# Altium PCB CH32F&V208R-R0-1v1.PcbDoc (part 2 of 3)
Units mil, origin at the board's own origin, x right, y up, seen from the top; angles counter-clockwise.
Board outline 3405.51 x 3740.16 mil, 2 copper layers (Top Layer, Bottom Layer); 61 components, 89 nets, 339 pads, 976 vias.
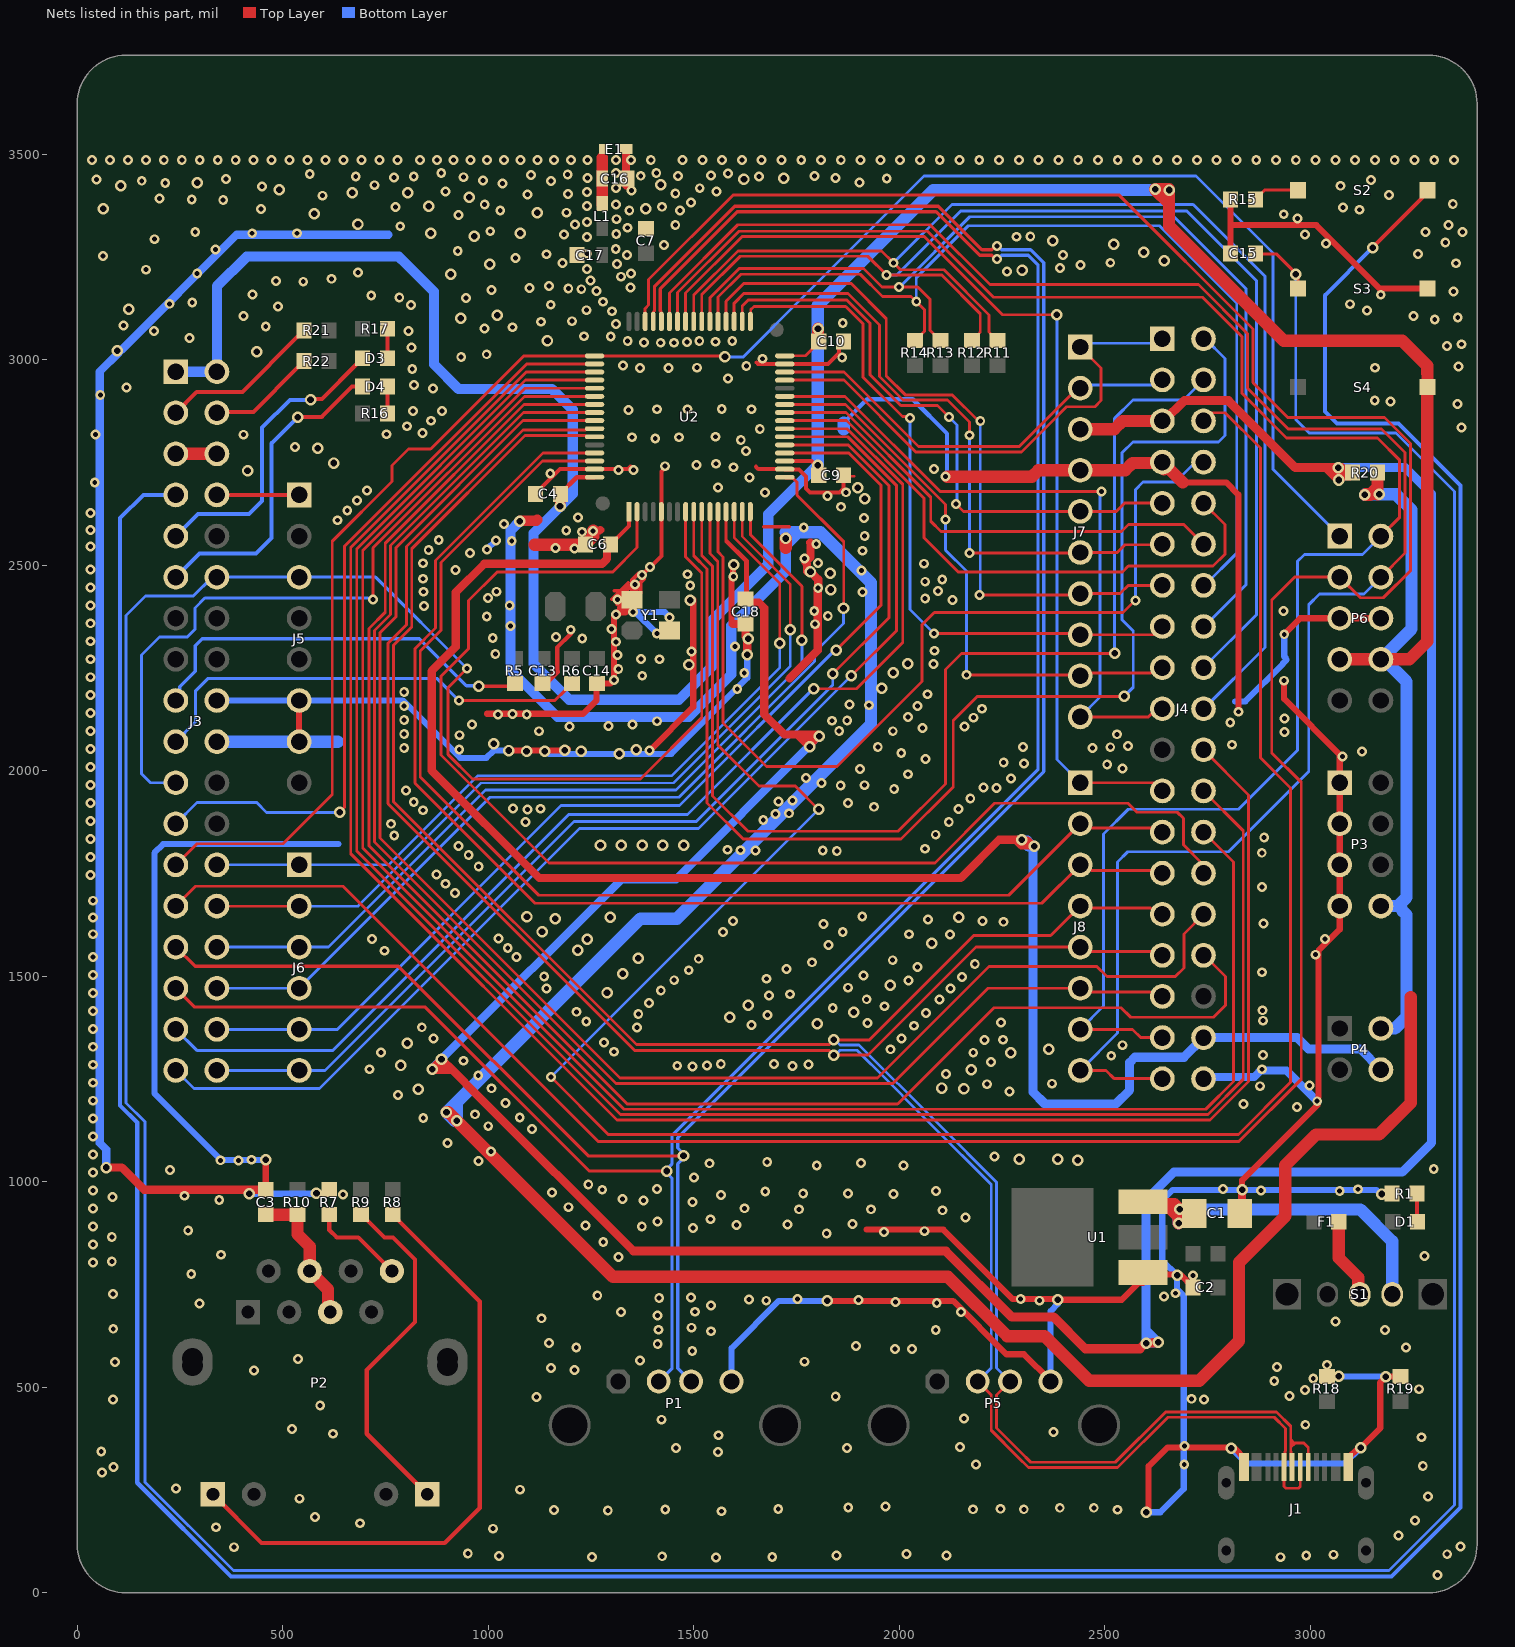
[diagram p2: the nets of this part, all layers, seen from the top]

## Via types
v1: diameter 24, hole 12, Top Layer to Bottom Layer, tented both sides, 809 vias
v2: diameter 28, hole 16, Top Layer to Bottom Layer, tented both sides, 167 vias

## Nets (pads, with @x,y where several pads share a name; then routed paths per layer and width w, separated by ;. In a path a pad name is that pad's centre, name@x,y a point inside that pad or via, vN(x,y) a via of type N, cw(c..) or ccw(c..) an arc to the next point about the centre after c; other vN are vias at no path point) (continued)
GND: C1.2 C2.2 C3.1 C4.2 C6.2 C7.2 C9.1 C10.1 C13.1 C14.1 C15.1 C16.1 C17.1 C18.2 E1.0 J1.A1 J1.B1 J3.5 J3.6 J3.18 J3.20 J4.7 J4.38 J5.6 J5.7 J7.4 P1.4 P3.1 P3.3 P3.5 P3.7 P5.4 P6.5 P6.6 R1.1 R7.1 R15.1 R18.2 R19.2 S3.1 U1.1 U2.5 U2.18 U2.31 U2.63 Y1.2 Y1.4 | length 27183.1
  Top Layer w6: 1591.3,2359.85 1594.82,2356.34
  Top Layer w7: 1112.3,2609.87 1113.28,2609.87 ; 1716.52,2547.24 1717.52,2546.24 ; 1722.74,2541.01 1717.52,2546.24 ; 1731.52,2546.24 1723.75,2546.24 1717.52,2546.24 ; C9.1@1866.65,2715.39 1867.24,2715.98 1889.28,2715.98
  Top Layer w8: 1300.4,2417.01 1320.9,2437.51 ; v1@1305.67,2421.76 1311.84,2421.76 1339.66,2449.58 v1@1349.16,2449.58 ; 1305.99,2437.51 1320.9,2437.51 ; v1(1314.15,2415.82) 1315.4,2415.82 v1@1349.16,2449.58 ; 1340.4,2457.01 1320.9,2437.51 ; 1669.33,2593.51 1731.95,2593.51 ; v1@1349.16,2449.58 1349.74,2450.16 1352.22,2452.64 v1(1356.33,2452.64) 1353.27,2449.58 1349.74,2449.58 v1@1349.16,2449.58
  Top Layer w10: C4.2@1115.12,2673.25 1115.12,2674.23 1174.18,2733.29 U2.63@1258.39,2733.29 1339.59,2733.29 v1@1345.74,2739.44 ; C13.1@1132.17,2212.01 C13.1@1133.15,2212.01 ; 1167.55,2299.76 v1@1200.48,2332.69 ; Y1.4@1357.44,2436.67 1364.47,2443.7 1370.33,2443.7 ; v1@1365.24,2479.6 1349.74,2464.09 1349.74,2450.16 1349.74,2449.58 Y1.4@1349.74,2415.82 1350.33,2415.82 1351.9,2415.82 1353.68,2415.82 1370.33,2432.47 1370.33,2443.7 ; v1(1374.19,2475.83) 1420.87,2522.52 U2.5@1420.87,2629.87 1420.87,2727.73 1429.89,2736.74 v1(1429.89,2740.53) ; v1@1378.59,2466.26 1370.33,2458 1370.33,2443.7 ; v1(1558.67,2688.79) v1@1560.58,2690.71 ; 1650.78,2739.09 1656.59,2733.29 U2.18@1721.15,2733.29 1721.5,2732.95 1755.62,2732.95 1772.82,2715.75 1772.82,2686.06 1782.35,2676.53 1854.46,2676.53 1864.37,2686.44 C9.1@1864.37,2718.39 ; 1653.04,2992.55 1656.4,2989.2 U2.31@1721.15,2989.2 1826.41,2989.2 1853.39,3016.18 1853.39,3029.72 1856.26,3032.59 C10.1@1869.8,3032.59
  Top Layer w12: 1167.55,2246.41 1167.55,2299.76
  Top Layer w15: C3.1@458.47,980.52 458.62,980.66 458.62,1052.88 v2(458.75,1053.02) ; J5.7@539.76,2070.54 J5.6@539.76,2170.54 ; 997.11,2138.19 1230.44,2138.19 1263.31,2171.06 1263.31,2212.02 C14.1@1264.31,2212.02 1296.97,2212.02 v1(1305.75,2220.8) 1305.75,2375.77 v1(1310.15,2380.16) v1@1317.8,2387.81 ; v2(1050,2048.87) 1189.9,2048.87 v2@1193.28,2052.25 ; C13.1@1132.15,2206.01 1166.55,2240.41 ; v1@1315.4,2415.82 Y1.4@1340.22,2415.82 ; v1@1315.67,2407.25 Y1.4@1331.65,2407.25 ; 1320.28,2395.88 Y1.4@1331.65,2407.25 ; Y1.4@1350.33,2415.82 1351.9,2417.39 1351.9,2415.82 v1(1351.9,2385.78) ; v1(1392.36,2048.78) 1498.5,2154.92 v2@1498.5,2416.59 ; 1591.3,2359.85 1591.3,2472.26 1594.87,2475.82 1594.87,2498.77 v2@1597.35,2501.25 ; v2(1824.06,709.96) 2130.51,709.96 2260.42,580.05 2302.81,580.05 2367.63,515.23 P5.4@2367.63,513.94 ; 1920.01,883.27 2106.7,883.27 2275.82,714.15 v1(2295.06,714.15) 2384.04,714.15 v2(2385.48,712.72) 2541.07,712.72 2582.26,753.91 U1.1@2592.58,753.91 ; U1.1@2592.58,778.91 2597.19,774.29 v2@2681.5,774.29 ; v2(2600.47,195.69) 2600.47,199.21 2606.13,204.87 2606.13,307.46 2652.33,353.66 2805.07,353.66 v2(2807.43,351.3) ; v2@2682.93,774.29 2714.12,743.1 C2.2@2714.12,742.72 ; 2689.27,2701.03 2795.02,2701.03 2824.65,2671.39 v1(2824.65,2143.13) ; C15.1@2805.76,3258.02 2805.76,3326.97 ; R15.1@2805.76,3389.32 2805.76,3326.97 ; v2@2817.7,348.82 2838.24,328.27 J1.A1@2838.24,305.64 ; v2(2833.67,979.93) 2833.67,1003.34 3016.37,1186.03 v1(3016.37,1195.75) ; v1(2935.76,2218.72) 2935.76,2174.25 3073.91,2036.1 v1@3073.91,2034.38 ; v1(2936.29,2331.58) 2975.29,2370.58 3171.38,2370.58 P6.6@3171.43,2370.53 ; v1@3019.2,1204.94 3019.2,1561.23 3071.43,1613.46 P3.7@3071.43,1670.54 P3.5@3071.43,1770.54 P3.3@3071.43,1870.54 P3.1@3071.43,1970.54 v1@3071.43,2034.38 ; R18.2@3040.06,526.17 3040.23,526.34 3069.06,526.34 v2(3069.23,526.52) ; J1.B1@3092.18,305.64 3092.18,328.27 3114.45,350.54 3119.72,350.54 v2(3122.2,353.03) 3169.66,400.49 3169.66,511.42 v2(3183.62,525.38) 3184.02,525.77 3218.81,525.77 R19.2@3219.21,526.17 ; v2(3173.34,969.89) 3173.93,970.48 3198.19,970.48 R1.1@3198.78,971.07 ; S3.1@3284.39,3172.51 3168.51,3172.51 3014.05,3326.97 2805.76,3326.97 ; v1@1317.8,2387.81 1320.4,2385.21 1333.72,2385.21 1333.72,2401.66 Y1.4@1339.3,2407.25 ; v1@1317.8,2387.81 Y1.4@1337.23,2407.25 ; Y1.4@1331.65,2407.25 Y1.4@1340.22,2415.82 ; Y1.4@1331.65,2407.25 Y1.4@1337.23,2407.25 ; Y1.4@1337.23,2407.25 Y1.4@1339.3,2407.25 ; Y1.4@1337.23,2407.25 Y1.4@1345.8,2415.82 ; Y1.4@1339.3,2407.25 1341.17,2407.25 Y1.4@1349.74,2415.82 Y1.4@1347.87,2415.82 ; Y1.4@1339.3,2407.25 Y1.4@1347.87,2415.82 ; Y1.4@1340.22,2415.82 Y1.4@1345.8,2415.82 ; Y1.4@1345.8,2415.82 Y1.4@1347.87,2415.82
  Top Layer w20: v2(70.46,1034.42) 108.26,1034.42 162.17,980.52 C3.1@458.47,980.52 ; v1@1255.9,2583.15 1256.67,2583.92 1270.43,2583.92 1272.03,2585.51 ; C16.1@1335.21,3424.1 E1.0@1335.21,3511.98 ; Y1.4@1349.74,2415.82 1351.14,2414.42 1351.14,2386.55 v1(1351.9,2385.78) ; 1594.82,2356.34 C18.2@1625.64,2356.34 v2@1625.64,2326.22 ; v2(1630,2282) 1630,2318.91 v2(1631.92,2320.82) ; 1733.01,2223.85 1801.21,2292.05 1801.21,2443.35 v1(1802.44,2444.57) 1802.44,2465.24 v2(1783.67,2484) ; v1(1769,2515.63) 1780.56,2515.63 1784.01,2519.08 1784.01,2554.37 1783.37,2555.01 ; v1@1771.37,2506.43 1775,2502.8 v2@1775,2484 ; C1.2@2827.59,922.82 2833.67,928.91 v2(2833.67,979.93)
  Top Layer w25: v2(1076.65,2606.9) 1077.23,2607.47 1116.38,2607.47 1119.02,2610.11
  Top Layer w30: J3.5@239.76,2770.54 J3.6@339.76,2770.54 ; v2(898.12,1169.2) 902.45,1169.2 v2(923.65,1148) 1303.16,768.49 2118.09,768.49 2262.32,624.26 2353.16,624.26 2462.09,515.33 2729.12,515.33 2777.06,563.27 2826,612.22 2826,803.58 2938.86,916.44 2938.86,1040.17 3013.32,1114.63 3166.9,1114.63 3243.97,1191.7 3243.97,1449.23 ; 1112.3,2549.24 1112.79,2549.73 1235.84,2549.73 C6.2@1236.33,2550.22 1239.64,2553.53 1239.64,2554.51 1254.87,2569.74 v1(1254.87,2583.15) ; 1722.74,2547.01 1723.75,2548.03 ; 1723.75,2542.03 1723.75,2546.24 1723.75,2548.03 ; v2@1723.75,2563.7 1723.75,2548.03 ; v1@2116.25,2715.13 2322.71,2715.13 2338.12,2730.54 J7.4@2439.76,2730.54 2549.39,2730.54 2567.25,2748.4 2637.62,2748.4 J4.7@2643.82,2733.39 ; J4.7@2639.76,2740.36 J4.7@2643.82,2733.39 ; J4.7@2639.76,2750.54 J4.7@2643.82,2746.48 ; J4.7@2643.82,2753.39 J4.7@2643.82,2746.48 ; 2689.27,2701.03 J4.7@2643.82,2746.48 ; J4.7@2643.82,2733.39 J4.7@2643.82,2746.48
  Bottom Layer w10: 1864.37,2846.01 1921.71,2903.35 2032.47,2903.35 2116.25,2819.57 v1@2116.25,2715.13
  Bottom Layer w15: J3.18@339.76,2170.54 J5.6@539.76,2170.54 791.41,2170.54 931.18,2030.77 995.16,2030.77 1013.26,2048.87 v2(1050,2048.87) ; v2(418.3,970.55) 580.86,970.55 v2(581.87,971.57) ; v2(458.75,1053.02) 349.49,1053.04 187.83,1214.69 187.83,1799.91 209.34,1821.41 635.37,1821.41 ; v1(996.32,2537.95) 1017.88,2559.51 v1(1018.24,2559.51) ; v2@1147.95,2040.71 1445.36,2040.71 1630,2225.35 v2(1630,2282) ; v1@1317.09,2415.31 1318.31,2414.1 1323.59,2414.1 v1(1351.9,2385.78) v1@1357.85,2385.78 ; v1(1409.79,2333.84) v1@1357.85,2385.78 ; v1@1442.12,2374.03 1440.95,2374.03 1429.2,2385.78 v1@1357.85,2385.78 ; P1.4@1591.63,513.94 1591.63,595.05 1706.54,709.96 v2(1824.06,709.96) ; P5.4@2367.63,513.94 2367.63,684.54 2385.48,702.39 v2(2385.48,712.72) ; v2(2600.47,195.69) 2635.06,195.69 2691.72,252.36 2691.72,722.45 2675.5,738.68 v2(2675.5,771.81) 2639.6,807.71 2639.6,954.78 2664.75,979.93 v2(2833.67,979.93) 3160.25,979.93 3170.29,969.89 v2(3173.34,969.89) ; v2(2807.43,351.3) 2844.08,314.65 3083.83,314.65 v2(3122.2,353.03) ; 2816.49,2168.24 2841.52,2168.24 2933.35,2260.06 2933.35,2261.03 2942,2269.68 ; v1(2936.29,2331.58) 2936.29,2277.34 2940.78,2272.85 ; v2(3069.23,526.52) 3069.8,525.95 3183.05,525.95 v2(3183.62,525.38)
  Bottom Layer w20: v2(70.46,1034.42) 70.46,1077.96 54.66,1093.75 54.66,2970.49 v2@101.37,3017.2 ; v2@99.48,3019.09 99.48,3022.15 100.57,3023.24 107.41,3023.24 387.74,3303.57 757.44,3303.57 ; J4.38@2739.76,1250.54 2743.59,1254.37 2863.26,1254.37 v1(2882.42,1273.53) ; v1@2882.42,1270.54 2941.58,1270.54 v1(3016.37,1195.75)
  Bottom Layer w25: v2(1076.65,2606.9) 1076.65,2606.57 1053.99,2583.91 1053.99,2244.69 1168.31,2130.37 1487.86,2130.37 1591.22,2233.73 1591.22,2352.3 1723.75,2484.84 1723.75,2546.44 ; 1723.75,2579.7 v2(1723.75,2564.7) 1723.75,2546.44 ; 1757.01,2579.7 1723.75,2546.44
  Bottom Layer w30: J3.20@339.76,2070.54 J5.7@539.76,2070.54 633.28,2070.54 ; v2(898.12,1169.2) 898.12,1168.4 v2@898.39,1168.13 ; 1723.75,2579.7 1757.01,2579.7 1808.18,2579.7 1930.99,2456.88 1930.99,2111.95 1458.93,1639.89 1370.15,1639.89 923.65,1193.39 ; 1864.37,2830.02 1864.37,2846.01 ; v2@898.39,1168.13 923.65,1193.39 ; v2@898.39,1168.13 918.52,1148 v2(923.65,1148) 923.65,1193.39
  other v1: 3309.02,43.07 1554.03,85.73 2927.33,86.41 1251.82,87.03 1690.68,86.82 1026.02,88.94 1422.96,88.62 1847,90.1 2114.84,90.1 2989.7,90.97 3055.88,92.49 2017.54,94.47 3332.66,93.7 950.01,95.59 380.95,110.71 3365.02,112.49 3214.44,138.9 1011.58,155.75 337.56,159.21 688,168.98 3254.19,175.6 578.68,184.23 1567.09,198.25 1290.64,199.71 1159.68,201.16 2530.52,201.76 1430.32,202.62 2179.04,202.96 2302.6,202.96 1705.32,204.07 2246.22,204.16 1875.56,206.98 2390.17,206.56 2472.94,206.56 1965.77,209.89 540.55,228.72 3286.3,233.7 1076.75,250.63 240.49,253.49 59.8,292.61 87.95,305.9 3273.3,308.61 2186.24,312.12 2692.89,312.36 1558.36,342.3 58.24,343.44 1456.51,352.49 1872.65,352.49 2147.85,354.11 2693.77,357.27 3270.24,378.18 1559.82,383.04 621.71,386.66 2374.83,391.21 522.3,398.49 2987.47,408.59 1421.59,420.87 2157.45,423.68 590.94,455.29 86.64,469.9 2740.7,470.07 2710.78,471.74 1117.32,475.89 1845,477.62 2949.41,478.18 2986.61,492.74 3264.13,495.14 2911.86,514.94 3006.77,521.01 429.99,540.5 1209.6,541.65 1152.06,546.65 2918.5,549.01 3040.06,554.48 91.49,561.24 1769.34,562.01 1369.09,565.18 536.5,568.9 1496.08,588.06 1989.5,592.82 2030.29,592.82 3231.97,596.2 1213.81,596.83 1894.48,599.84 1412.02,605.18 1147.95,607.09 1541.31,636.02 2088.37,639.48 3181.61,638.73 1413.81,639.76 87.45,642.07 1493.9,644.74 3060.72,660.04 1128.9,667.58 1411.57,674.34 1322.82,682.94 1503.04,683.48 2149.99,682.84 1541.62,698.69 297.45,703.81 2090.9,704.6 1990.51,707.51 1676.02,710.37 2340.68,710.43 1900.3,711.88 1634.02,713.33 1751.88,714.79 1415.61,716.55 1493.35,717.77 2643.39,720.8 1265.05,723.2 87.17,726.67 2671.81,728.59 2714.12,772.01 277.24,774.99 37.95,803.55 83.97,805.65 1316.36,816.77 3277.39,819.39 349.52,822.16 37.95,847.26 1279.5,853.63 83.97,865.42 1823.14,873.45 1962.26,877.08 2061.46,879.5 269.8,881.29 1497.84,887.08 37.95,890.97 1373.34,890.53 1236.49,893.13 1603.41,894.56 1728.01,895.77 1885.81,897.22 1411.33,903.14 1540.06,908.54 2160.69,912.47 2105.01,930.31 1755.4,932.73 1930.81,932.73 37.95,934.68 1623.54,935.15 1195.24,937.89 1497.05,950.94 1377.53,954.48 345.32,955.74 1326.36,958.22 86.1,962.54 260.67,965.75 1566.28,967.46 646.27,969.01 1985.25,970.23 1765.99,971.59 1874.79,971.59 1155.17,973.61 1673.71,975.72 2088.86,977.12 37.95,978.39 3071.09,977.64 2879.54,978.84 1277.06,980.37 3115.94,981.48 1410.14,982.15 2787.41,981.77 1243.2,992.85 1500.21,1010.07 37.95,1022.1 225.97,1028.55 3299.88,1030.56 1798.97,1039.39 2009.84,1039.37 1537.93,1044.64 1906.95,1045.68 1678.41,1047.78 976.15,1050.15 392.49,1051.26 348.72,1051.94 423.94,1053.31 2231.5,1061.16 37.95,1065.81 1006.68,1073.54 900.79,1093.68 37.95,1109.52 1105.91,1128.51 999.84,1134.93 37.95,1153.23 841.67,1154.74 1076.45,1156.32 967.68,1163.82 2966.91,1181.89 2836.98,1189.22 1042.09,1191.09 37.95,1196.95 780.6,1210.62 2267.54,1219.67 1007.32,1227.09 2877.18,1232.19 2997.28,1233.62 2213.48,1237.12 2371.26,1238.27 37.95,1240.66 975.41,1258.59 2113.23,1261.9 710.72,1273.5 1496.88,1279.9 1740.31,1281.5 1459.58,1281.9 1532.17,1282.23 37.95,1284.37 1778.49,1285.42 1695.28,1286.4 1565.47,1286.56 2222.49,1291.19 939.41,1294.18 2515.41,1306.35 2884.54,1308.04 738.97,1314.3 2179.69,1313.72 1305.43,1316.01 1978.62,1321.97 37.95,1328.08 2542.56,1331.94 1281.78,1338.23 2206.72,1344.69 2252.34,1345.26 866.22,1348.48 2005.01,1348.7 37.95,1371.79 1361.3,1374.99 838.11,1375.52 2035.48,1379.27 1640.34,1380.75 1922.05,1386.08 2247.27,1386.93 1238.19,1390.01 2884.28,1391.52 1679.42,1405.73 1364.76,1407.58 2064.59,1409.92 1214.23,1413.22 37.95,1415.5 2883.21,1416.89 1837.92,1422.45 1963.84,1426.79 1391.11,1434.62 1920.42,1443.61 2097.1,1443.55 1682.39,1452.83 1733.91,1455.9 37.95,1459.21 1419.54,1465.13 1141.65,1469.46 2124.6,1470.13 1874.83,1471.84 2021.82,1489.28 1452.14,1490.1 1676.43,1493.58 2151.96,1498.18 1135.89,1499.3 1912.57,1501.94 37.95,1502.92 2882.2,1509.5 1487.5,1514.37 1724.94,1517.64 2043.7,1522.12 2183.44,1529.66 1787.21,1533.65 1983.68,1538.76 1511.77,1542.11 37.95,1546.63 1068.39,1546.55 3012.26,1552.15 747.67,1561.65 1047.26,1568.16 1827.8,1575.33 3035.65,1590.16 716.66,1590.6 1024.69,1591.69 2122.89,1601.3 37.95,1601.99 2023.53,1601.81 1570.72,1607.29 1862.21,1607.17 1815.66,1626.43 2885.96,1628.38 2253.2,1632.13 1594.99,1634.33 2202.45,1634.17 2069.43,1638.12 37.95,1642.72 1909.55,1644.95 37.95,1683.46 918.54,1702.56 2881.98,1716.38 895.61,1724.7 32.17,1746.35 873.86,1747.63 976.54,1766.83 32.17,1790.07 952.24,1794.37 2881.61,1800.03 1813.57,1805.5 1847.73,1804.55 1613.31,1806.22 1649.59,1805.72 1581.78,1807.47 2062.18,1809.92 926.99,1816.38 32.17,1833.78 2887.41,1836.97 771.08,1842.11 2088.31,1844.02 763.17,1870.57 1090.64,1875.21 2120.19,1874.58 32.17,1877.49 1668.77,1879.46 1698.72,1894.43 1731.34,1896.1 841.21,1903.53 1094.89,1905.3 2144.11,1906.46 1127.27,1907.26 1060.23,1907.58 1938.54,1911.91 32.17,1921.2 1875.04,1921.28 818.49,1923.45 1705.71,1924.72 1739.99,1927.38 2172.45,1932.15 799.41,1951.23 1987.35,1955.46 2236.37,1957.53 2204.65,1958.53 1857.15,1963.76 1915.06,1964.44 32.17,1964.91 1810.69,1969.93 2271.56,1980.34 1773.02,1981.7 2021.05,1991.09 1904.43,2003.95 2542.48,2005.35 32.17,2008.62 2505.54,2014.83 2303.29,2017.02 2253.72,2019.99 2063.06,2028.61 3078.07,2034.38 2004.52,2042.91 3125.66,2046.01 929.19,2051.13 32.17,2052.33 795.28,2055 2469.81,2055.31 2513.02,2056.88 1947.46,2057.53 2300.81,2057.66 2555.91,2060.01 2809.02,2062.89 929.74,2086.15 2529.52,2088.3 795.28,2089.08 2937.17,2093.6 32.17,2096.04 1123.61,2095.85 1853.51,2096.32 1983.93,2095.86 2056.32,2103.33 1197.75,2107.02 2158.25,2107.49 1292.12,2108.82 960.09,2112.1 1350.7,2112.23 2804.78,2116.9 1409.85,2120.19 1835.6,2121.26 1873.01,2122.22 795.28,2123.16 2936.82,2127.16 2180.64,2128.7 2021.28,2129.99 1023.07,2136.88 1058.62,2137.24 1093.44,2136.52 32.17,2139.75 2201.18,2150.42 795.28,2157.25 2044.14,2157.35 1926.02,2158.92 1878.17,2161.15 32.17,2183.47 2067.96,2185.68 795.28,2191.33 1605.59,2198.29 32.17,2227.18 1374.35,2230.73 1622.55,2237.35 1316.19,2247.46 2082.64,2259.31 32.17,2270.89 1416.74,2270.85 1371.32,2271.61 1314.51,2281.49 1016.95,2283.62 1494.65,2289.87 2085.01,2291.5 1600.45,2301.6 1310.21,2313.3 32.17,2314.6 1010.65,2322.25 1228.4,2321.77 1164.42,2324.92 1200.48,2342.69 1299.61,2344.52 1053.48,2351.33 1795.08,2356.11 32.17,2358.31 1440.29,2372.67 996.08,2375.06 1825.83,2375.78 1792.86,2388.25 2934.5,2388.57 843.53,2400.51 32.17,2402.02 1051.95,2401.84 2128.76,2415.35 2062.72,2418.75 999.15,2419.78 1910.65,2434.24 841.93,2435.02 1020.27,2435.19 2094.04,2437.24 32.17,2445.73 1491.23,2449.84 2062.72,2459.51 2104.23,2464.79 840.66,2466.65 1595.95,2472.26 1484.36,2477.62 1908.19,2486.58 919.68,2487.56 32.17,2489.44 1392.92,2495.55 2059.7,2503.28 840.98,2504.36 1801.7,2505.24 955.68,2529.63 1910.65,2534.83 854.86,2536.49 1163.5,2541.39 1209.23,2540.74 32.17,2544.8 1797.72,2551.51 1056.92,2558.85 879.32,2560.92 1915.55,2570.82 1228.04,2580.92 1189.52,2584.52 32.17,2585.53 1767.36,2591.71 1038.03,2599.49 632.71,2609.01 1913.92,2614.16 1217.68,2615.53 32.17,2626.27 656.71,2633.01 1857.6,2641.75 680.71,2657.01 1824.79,2668 1672.94,2676.29 1869.9,2677.02 704.71,2681.01 42.55,2701.27 1635.61,2712.75 2112.25,2715.13 1150.6,2722.97 1316.43,2731.42 1353.5,2730.98 2084.15,2733.63 1596.55,2737.92 1506.27,2743.13 1553.87,2746.46 1627.14,2777.86 529.45,2787.03 1614.13,2803.82 1406.03,2807.97 1349.71,2810.93 1464.14,2810.93 1552.48,2812.12 404.11,2817.14 44.04,2817.91 752.67,2818.31 839.44,2821.51 1660.38,2831.09 3367.35,2834.65 801.78,2837.64 860.56,2851.01 816.85,2874.48 887.27,2874.92 1340.82,2877.34 1410.18,2879.12 1484.29,2879.12 1640.22,2879.12 1567.89,2879.71 3357.36,2891.63 3194.57,2897.63 3156.3,2900.72 56.01,2913.31 864.93,2929.5 120.16,2931.88 819.09,2938.04 1583.3,2953.74 814.89,2977.15 1369.13,2978.96 1438.15,2978.96 1507.76,2980.14 3156.73,2980.03 3359.76,2983.07 1627.51,2984.16 1327.24,2985.38 1667.13,3001.89 1860.81,3004.77 933.99,3006.15 996.04,3012.73 812.94,3029.35 3332.46,3033.23 3367.58,3037.2 1378.37,3041.37 1419.27,3040.87 1452.09,3040.87 1482.89,3042.38 1552.68,3043.25 1338.99,3045.41 1513.18,3045.12 1593.31,3044.89 273.22,3052.55 1297.75,3055.65 1232.63,3056.64 186.99,3069.48 806.09,3069.17 990.8,3075.49 1058.63,3078.57 458.52,3080.27 112.64,3082.78 1310.33,3086.46 1862.21,3088.51 1127.98,3091.85 1203.56,3093.22 3302.32,3097.01 3358.36,3102.46 404.71,3105.85 3250.4,3106.16 1301.03,3117.39 3137.52,3119.28 1238.95,3120.02 488.51,3128.78 812.08,3133.05 1151.75,3133.35 3096.23,3134.65 224.06,3135.56 279.67,3138.79 1279.18,3140.51 945.39,3149.41 783.41,3151.03 715.07,3155.47 425.88,3157.89 3171.01,3157.58 3347.77,3165.2 1262.77,3166.76 1007.83,3169.03 1226.17,3171.13 1194.51,3172.79 1100.49,3173.87 1345.88,3175.49 1147.29,3178.9 549.78,3189.37 483.21,3191.41 1248.19,3192.58 618.7,3196.4 1322.36,3201.48 291.76,3208.9 1347.15,3209.55 682.88,3211.84 2261.61,3214.01 166.84,3218.57 1239.92,3220.23 2391.11,3222.33 2440.96,3229.68 1313.22,3232.22 1180.06,3234.46 3354.14,3234.22 2513.05,3235.41 1066.22,3246.59 62.88,3251.61 1337,3254.12 2397.58,3254.14 1141.18,3256.12 1239.92,3257.31 3261.25,3256.72 925.61,3263.89 336.08,3267.73 1309.92,3268.8 1427.25,3278.42 3037.97,3282.61 3328,3284.74 187.8,3292.72 1239.92,3298.2 2284.51,3298.7 2318.46,3299.32 1183.95,3304.45 2986.4,3303.85 1311.11,3305.61 425.54,3307.22 534.34,3307.22 286.92,3310.45 3280.2,3310.28 3370.03,3310.28 1004.72,3312.04 1338.79,3320.53 785.75,3324.25 1454.78,3327.39 1211.17,3328.34 3335.42,3327.59 1239.92,3334.76 1311.71,3341.37 2968.52,3343.03 927.36,3351.92 2934.97,3353.35 1190.06,3357.23 1029.01,3362.38 1342.93,3362.61 1466.07,3362.77 3118.89,3364.32 446.71,3366.32 3079.53,3370.13 773.94,3370.93 1422.8,3371.55 1239.92,3373.13 1310.5,3377.36 991.15,3377.58 3346.25,3378.54 1493.02,3381.71 355,3387.82 278.49,3389.37 200.14,3391.67 596.5,3398.58 3190.65,3400.48 1095.39,3401.86 1193.83,3402.45 1454.78,3403.89 1239.92,3407.24 895.88,3408.37 1555.03,3408.83 1348.1,3411.25 1310.98,3417.13 1514.25,3416.77 449.58,3420.61 3072.93,3422.62 723.19,3424.11 1034.73,3428.68 213.96,3429.69 1903.25,3430.86 1152.52,3433.89 156.86,3434.82 986.68,3435.39 3147.38,3436.71 46.77,3437.87 361.45,3438.91 1969.21,3440.37 1241.47,3441.41 1844.5,3441.62 770.65,3443.23 939.85,3443.54 677.39,3445.17 818.57,3445.17 1658.4,3445.39 1370.69,3446.93 1461.07,3446.65 1793.26,3446.9 1541.69,3447.78 1103.4,3448.89 1193.05,3450.4 565.45,3451.54 885.37,3453.4 1583.29,3452.85 1310.98,3453.69 1408.55,3453.83 35.67,3485.41 79.38,3485.41 123.09,3485.41 166.8,3485.41 210.51,3485.41 254.22,3485.41 297.93,3485.41 341.64,3485.41 385.35,3485.41 429.07,3485.41 472.78,3485.41 516.49,3485.41 560.2,3485.41 603.91,3485.41 647.62,3485.41 691.33,3485.41 735.04,3485.41 778.75,3485.41 834.11,3485.41 874.84,3485.41 915.58,3485.41 956.31,3485.41 997.05,3485.41 1037.79,3485.41 1078.52,3485.41 1119.26,3485.41 1159.99,3485.41 1200.73,3485.41 1241.47,3485.41 1310.98,3485.53 1347.12,3485.53 1395.24,3485.53 1472.46,3485.53 1520.59,3485.53 1568.71,3485.53 1616.83,3485.53 1664.96,3485.53 1713.08,3485.53 1761.2,3485.53 1809.33,3485.53 1857.45,3485.53 1905.58,3485.53 1953.7,3485.53 2001.82,3485.53 2049.95,3485.53 2098.07,3485.53 2146.19,3485.53 2194.32,3485.53 2242.44,3485.53 2290.57,3485.53 2338.69,3485.53 2386.81,3485.53 2434.94,3485.53 2483.06,3485.53 2531.18,3485.53 2579.31,3485.53 2627.43,3485.53 2675.55,3485.53 2723.68,3485.53 2771.8,3485.53 2819.93,3485.53 2868.05,3485.53 2916.17,3485.53 2964.3,3485.53 3012.42,3485.53 3060.54,3485.53 3108.67,3485.53 3156.79,3485.53 3204.92,3485.53 3253.04,3485.53 3301.16,3485.53 3349.29,3485.53
  other v2: 2433.73,1052.53 2291.85,1054.85 2384.89,1054.85 829.99,1224.82 2157.11,1226.46 2103.19,1227.81 2174.64,1272.29 786.82,1282.66 2270.36,1313.15 2363.38,1321.63 802.36,1336.19 1800.14,1384.06 1587.58,1399.7 1888.56,1412.6 1632,1429.27 1288.69,1459.79 1978.11,1478.24 1326.52,1506.18 1364.77,1543.21 1217.17,1562.61 2078.47,1579.69 1240.91,1589.96 1130.57,1607.96 1162.44,1639.83 1296.89,1643.08 2143.93,1642.96 1093.97,1644.55 1272.84,1818.69 1323.48,1818.69 1374.12,1818.69 1424.75,1818.69 1475.39,1818.69 1318.1,2041.26 1092.9,2046.93 1137,2047.23 1225.46,2047.18 1185.72,2049.13 1359.88,2050.38 1012.75,2065.14 1957.01,2199.83 1985.13,2238.13 1488.07,2257.32 2020.68,2259.89 1491.62,2414.13 1832.79,2440.54 1831.95,2479.75 1597.35,2500.25 1915.54,2660.96 1898.86,2688.21 414.14,2729.11 623.48,2748.28 584.91,2784.59 436.15,3019.34 96.87,3021.7 1143.83,3046.09 933.01,3100.19 1021.78,3107.58 125.55,3122.08 908.03,3207.93 2298.32,3216.7 1003.81,3231.77 2644.14,3240.76 2594.36,3260.88 2521.29,3279.94 2372.56,3288.65 965.43,3299.81 859.96,3307.62 1077.95,3307.66 682.86,3329 576.3,3354.6 1118.85,3356.57 62.9,3366.46 1383.01,3366.69 854.93,3373 953.48,3394.91 669.03,3405.69 803.51,3406.22 491.75,3413.24 105.6,3422.54 1419.39,3425.3 291.39,3430.16 1621.87,3438.19 1718.7,3440.69
KEY: J3.7 S2.1 | length 9440.3
  Top Layer w10: v2(3151.38,3272.1) 3151.38,3272.87 3286.1,3407.59 3283.03,3410.66 S2.1@3284.39,3412.01
  Bottom Layer w10: J3.7@239.76,2670.54 160.69,2670.54 104.34,2614.19 104.34,1185.72 145.91,1144.15 145.91,267.55 374.1,39.36 3197.2,39.36 3364.9,207.07 3364.9,2693.85 3214.08,2844.68 3064.3,2844.68 3035.55,2873.42 3035.55,3156.28 v2(3151.38,3272.1)
LED1: D3.2 J3.9 | length 738.5
  Top Layer w10: v2(567.37,2901.81) 569.7,2904.15 595.24,2904.15 679.82,2988.72 680.8,2988.72 694.11,3002.03 D3.2@694.11,3003.01
  Bottom Layer w10: J3.9@239.76,2570.54 293.29,2624.07 417.77,2624.07 449.75,2656.04 449.75,2834.24 517.32,2901.81 v2(567.37,2901.81)
LED2: D4.2 J3.11 | length 781.4
  Top Layer w10: v2(536.44,2860.06) 594.66,2860.06 668.61,2934.01 D4.2@694.11,2934.01
  Bottom Layer w10: J3.11@239.76,2470.54 297.51,2528.29 435.24,2528.29 472.66,2565.71 472.66,2796.27 v2(536.44,2860.06)
NetC3_2: C3.2 P2.4 P2.5 R10.1 | length 348.5
  Top Layer w30: C3.2@458.47,919.89 R10.1@535.72,919.89 ; R10.1@535.08,919.25 R10.1@535.72,919.89 ; P2.5@615.37,682.53 609.81,688.09 609.81,738.09 P2.4@565.37,782.53 565.37,842.25 535.72,871.89 R10.1@535.72,919.89
NetC16_2: C16.2 E1.1 L1.2 | length 114.5
  Top Layer w28.1: L1.2@1276.63,3376.21 1276.63,3490.74
NetD1_2: D1.2 R1.2 | length 69.2
  Top Layer w10: R1.2@3259.41,971.07 3259.41,903.84 D1.2@3260.79,902.46
NetD3_1: D3.1 R17.2 | length 72
  Top Layer w10: D3.1@754.74,3003.01 R17.2@754.74,3075.01
NetD4_1: D4.1 R16.2 | length 65
  Top Layer w10: R16.2@754.74,2869.01 D4.1@754.74,2934.01
NetF1_2: F1.2 S1.1 | length 195.8
  Top Layer w30: F1.2@3068.78,902.46 3068.78,814.17 3116.31,766.64 3116.31,737.79 S1.1@3124.42,729.67
NetJ3_3: J3.3 R21.2 | length 395.6
  Top Layer w10: J3.3@239.76,2870.54 290.54,2921.32 402.04,2921.32 537.45,3056.72 538.43,3056.72 551.74,3070.03 R21.2@551.74,3071.01
NetJ3_4: J3.4 R22.1 | length 264.5
  Top Layer w10: J3.4@339.76,2870.54 341.79,2872.57 428.29,2872.57 537.45,2981.72 538.43,2981.72 551.74,2995.03 R22.1@551.74,2996.01
NetJ3_8: J3.8 J5.1 | length 200
  Top Layer w10: J3.8@339.76,2670.54 J5.1@539.76,2670.54
NetP2_8: P2.8 R7.2 | length 231.1
  Top Layer w10: R7.2@612.97,919.89 612.97,882.58 631.28,864.27 683.63,864.27 P2.8@765.37,782.53
NetP2_9: P2.9 R8.2 | length 1535.8
  Top Layer w10: P2.9@329.74,239.53 448.29,120.98 893.99,120.98 979.1,206.09 979.1,708.26 781.77,905.6 781.77,906.58 768.46,919.89 R8.2@767.48,919.89
NetP2_12: P2.12 R9.2 | length 856.7
  Top Layer w10: R9.2@690.23,919.89 691.21,919.89 746.95,864.15 767.61,864.15 821.12,810.63 821.12,658.39 704.2,541.47 704.2,386.73 P2.12@851.39,239.53
NetR15_2: R15.2 S2.2 | length 113
  Top Layer w7: R15.2@2866.39,3389.32 2866.39,3390.3 2888.1,3412.01 S2.2@2969.43,3412.01
NRST: C15.2 J3.12 J5.3 S3.2 U2.8 | length 11313.1
  Top Layer w7: v1(948.09,2248.32) 902.29,2202.52 902.29,2038.72 961.8,1979.22 1369.86,1979.22 1519.21,2128.56 1519.21,2480.87 1479.93,2520.15 U2.8@1479.93,2629.87 ; C15.2@2866.39,3258.02 2867.24,3257.18 2916.92,3257.18 2964.12,3209.97 v2(2964.12,3207.95) 2969.43,3202.64 S3.2@2969.43,3172.51
  Bottom Layer w7: v1(948.09,2248.32) 725.88,2470.54 J5.3@539.76,2470.54 J3.12@339.76,2470.54 328.28,2470.54 282.22,2424.48 166.1,2424.48 118.84,2377.22 118.84,1191.72 164.32,1146.24 164.32,269.64 380.11,53.86 3191.19,53.86 3350.4,213.07 3350.4,2679.02 3207.94,2821.48 2996.92,2821.48 2964.12,2854.28 v2(2964.12,3207.95)
PA0: J3.26 J6.1 U2.14 | length 1993.9
  Top Layer w6: U2.14@1598.04,2629.87 1598.04,2566.7 1709.22,2455.52 1709.22,2310.13 v2(1709.42,2309.92)
  Bottom Layer w6: J3.26@339.76,1770.54 J6.1@539.76,1770.54 757.32,1770.54 974.46,1987.68 1446.45,1987.68 1709.22,2250.44 1709.22,2309.72 v2(1709.42,2309.92)
PA1: J3.28 J6.2 U2.15 | length 2060.9
  Top Layer w6: J3.28@339.76,1670.54 J6.2@539.76,1670.54 ; U2.15@1617.72,2629.87 1617.72,2569.56 1734.74,2452.55 v2(1734.74,2342.47)
  Bottom Layer w6: J6.2@539.76,1670.54 683.29,1670.54 982.53,1969.78 1450.42,1969.78 1734.74,2254.1 v2(1734.74,2342.47)
PA2: J3.30 J6.3 U2.16 | length 2130.9
  Top Layer w7: U2.16@1637.41,2629.87 1637.41,2573.7 1762.85,2448.25 v2(1762.85,2316.58)
  Bottom Layer w7: J3.30@339.76,1570.54 J6.3@539.76,1570.54 610.78,1570.54 993.41,1953.16 1456.77,1953.16 1762.85,2259.25 v2(1762.85,2316.58)
PA3: J3.32 J6.4 U2.17 | length 2343.6
  Top Layer w7: U2.17@1721.15,2713.61 1722.72,2712.04 1740.44,2712.04 1751.09,2701.38 1751.09,2670.04 1864.47,2556.66 1864.47,2398.9 1857.66,2392.1 1860.57,2395 v2(1864,2395)
  Bottom Layer w7: J3.32@339.76,1470.54 J6.4@539.76,1470.54 1004.27,1935.05 1463.55,1935.05 1793.56,2265.06 1793.56,2287.08 1864,2357.52 v2(1864,2395)
PA4: J3.34 J6.5 U2.20 | length 2601.9
  Top Layer w7: U2.20@1721.15,2772.66 1876.75,2772.66 1955.33,2694.08 1955.33,2402.15 1846.45,2293.27 v2(1846.45,2292.59)
  Bottom Layer w7: J3.34@339.76,1370.54 J6.5@539.76,1370.54 632.44,1370.54 1176.71,1914.81 1464.85,1914.81 1842.64,2292.59 v2(1846.45,2292.59)
PA5: J3.36 J6.6 U2.21 | length 2723.6
  Top Layer w7: U2.21@1721.15,2792.35 1875.45,2792.35 1975.08,2692.71 1975.08,2372.43 1838.74,2236.09 v2(1837.95,2236.09)
  Bottom Layer w7: J3.36@339.76,1270.54 J6.6@539.76,1270.54 602.73,1270.54 1208.1,1875.91 1505.7,1875.91 1837.95,2208.16 v2(1837.95,2236.09)
PA6: J3.35 U2.22 | length 2906.7
  Top Layer w7: U2.22@1721.15,2812.03 1874.15,2812.03 1993.33,2692.86 1993.33,2341.19 v2(1883.27,2231.14)
  Bottom Layer w7: J3.35@239.76,1270.54 283.79,1226.51 589.45,1226.51 1222.07,1859.13 1511.27,1859.13 v2(1883.27,2231.14)
PA7: J3.33 U2.23 | length 2928.3
  Top Layer w7: U2.23@1721.15,2831.72 1872.85,2831.72 2008.04,2696.53 2008.04,2311.41 1895.62,2199 v2(1792,2199)
  Bottom Layer w7: J3.33@239.76,1370.54 290.79,1319.51 621.96,1319.51 1195.65,1893.19 1484.62,1893.19 1790.43,2199 v2(1792,2199)
PA8: J4.23 J8.1 U2.41 | length 2469.8
  Top Layer w7: U2.41@1479.93,3092.62 1479.93,3161.52 1617.53,3299.13 2060.37,3299.13 2250.44,3109.06 v2(2383.2,3109.06) ; J8.1@2439.76,1970.54 J4.23@2639.76,1970.54
  Bottom Layer w7: v2(2383.2,3109.06) 2383.2,2027.1 J8.1@2439.76,1970.54
PA9: J4.35 J8.7 P6.2 U2.42 | length 4354.8
  Top Layer w7: U2.42@1460.24,3092.62 1460.24,3162.83 1609.54,3312.13 2068.25,3312.13 2228.73,3151.65 2737.1,3151.65 2833.84,3054.91 2833.84,2917.06 2941.78,2809.12 3162.87,2809.12 3216.99,2755 3216.99,2616.1 P6.2@3171.43,2570.53 ; J8.7@2439.76,1370.54 2567.19,1370.54 2587.19,1350.54 J4.35@2639.76,1350.54
  Bottom Layer w7: J8.7@2439.76,1370.54 2496.82,1427.59 2496.82,1846.04 2556.78,1906.01 2825.04,1906.01 2968.03,2049 2968.03,2508.29 2985.34,2525.6 3126.49,2525.6 P6.2@3171.43,2570.53
PA10: J4.37 J8.8 P6.4 U2.43 | length 4481
  Top Layer w7: U2.43@1440.56,3092.62 1440.56,3161.94 1606.59,3327.97 2074.78,3327.97 2220.34,3182.4 2727.39,3182.4 2846.99,3062.8 2846.99,2930.31 2946.06,2831.24 3172.83,2831.24 3229.99,2774.08 3229.99,2529.1 P6.4@3171.43,2470.53 ; J8.8@2439.76,1270.54 2502.82,1270.54 2522.82,1250.54 J4.37@2639.76,1250.54
  Bottom Layer w7: J8.8@2439.76,1270.54 2530.66,1361.44 2530.66,1777.91 2555.46,1802.71 2800.98,1802.71 2995.93,1997.65 2995.93,2403.35 3022.2,2429.62 3130.51,2429.62 P6.4@3171.43,2470.53
PA11: J3.31 P1.2 U2.44 | length 5624.8
  Top Layer w8: J3.31@239.76,1470.54 285.58,1424.72 846.67,1424.72 1245.5,1025.89 v2(1434.04,1025.89) ; U2.44@1420.87,3092.62 1420.15,3093.35 1420.15,3116.7 1418.03,3118.82 1418.03,3171.65 1605.58,3359.19 2089.23,3359.19 2195.02,3253.41 2224.43,3253.41 2232.99,3244.85 v1(2237.12,3244.85)
  Bottom Layer w8: P1.2@1414.46,513.94 1446.83,546.31 1446.83,1007.69 1434.04,1020.48 v2(1434.04,1025.89) 1434.04,1031.3 1446.83,1044.1 1446.83,1112.93 2337.28,2003.38 2337.28,3229.45 2313.33,3253.41 2248.63,3253.41 2240.08,3244.85 v1(2237.12,3244.85)
PA12: J3.29 P1.3 U2.45 | length 5739.1
  Top Layer w8: J3.29@239.76,1570.54 286.45,1523.85 781.18,1523.85 1242.5,1062.53 v2(1474.75,1062.53) ; U2.45@1401.19,3092.62 1401.92,3093.35 1401.92,3116.7 1404.03,3118.82 1404.03,3177.45 1599.78,3373.19 2095.03,3373.19 2200.82,3267.41 2224.43,3267.41 2232.99,3275.96 v1(2237.12,3275.96)
  Bottom Layer w8: P1.3@1493.2,513.94 1460.83,546.31 1460.83,1043.21 1474.75,1057.12 v2(1474.75,1062.53) 1474.75,1067.95 1460.83,1081.86 1460.83,1107.13 2351.28,1997.58 2351.28,3235.25 2319.12,3267.41 2248.63,3267.41 2240.08,3275.96 v1(2237.12,3275.96)
PA13: J3.27 P6.3 U2.46 | length 7360.6
  Top Layer w7: J3.27@239.76,1670.54 287.74,1718.51 646.32,1718.51 1266.73,1098.1 2826.3,1098.1 2977.51,1249.31 2977.51,1971.51 2905.93,2043.08 2905.93,2414.96 2961.51,2470.53 P6.3@3071.43,2470.53 3121.53,2420.43 3177.18,2420.43 3242.99,2486.24 3242.99,2795.87 3179.88,2858.98 2944.73,2858.98 2859.99,2943.72 2859.99,3074.6 2534.77,3399.82 1595.18,3399.82 1389.69,3194.32 1389.69,3132.6 1381.5,3124.42 U2.46@1381.5,3092.62
PA14: J3.25 P6.1 U2.49 | length 4582
  Top Layer w7: J3.25@239.76,1770.54 291.35,1822.12 500.67,1822.12 620.18,1941.64 620.18,2557.75 765.85,2703.42 765.85,2742.19 806.04,2782.39 859.72,2782.39 1086.21,3008.88 U2.49@1258.39,3008.88 1573.31,3008.88 v2(1575.69,3006.5)
  Bottom Layer w7: v2(1575.69,3006.5) 1620.21,3006.5 1770.46,3156.76 2059.85,3446.14 2721.6,3446.14 2908.86,3258.88 2908.86,2733.1 P6.1@3071.43,2570.53
PA15: J3.23 U2.50 | length 1874.3
  Top Layer w7: v2(638.4,1898.31) 638.4,1898.82 650.09,1910.51 650.09,2545.93 1093.36,2989.2 U2.50@1258.39,2989.2
  Bottom Layer w7: J3.23@239.76,1870.54 291.38,1922.16 436.53,1922.16 460.38,1898.31 v2(638.4,1898.31)
PB0: J4.17 J7.9 U2.26 | length 1420.2
  Top Layer w7: U2.26@1721.15,2890.77 1868.95,2890.77 2112.42,2647.3 v1(2112.42,2610.99) ; v1(2163.44,2233.01) 2420.37,2233.01 2425.08,2228.31 2433.54,2236.76 J7.9@2439.76,2230.54 2446.84,2237.62 2612.5,2237.62 2625.42,2250.54 J4.17@2639.76,2250.54
  Bottom Layer w7: v1(2112.42,2610.99) 2112.42,2536.22 2163.44,2485.19 v1(2163.44,2233.01)
PB1: J4.19 J7.10 U2.27 | length 1650.4
  Top Layer w7: U2.27@1721.15,2910.46 1867.65,2910.46 2099.49,2678.62 v1(2491.67,2678.62) ; J7.10@2439.76,2130.54 2605.42,2130.54 J4.19@2639.76,2164.88
  Bottom Layer w7: J7.10@2439.76,2130.54 2488.12,2178.9 2488.12,2667.04 2488.42,2667.34 2488.42,2675.37 v1(2491.67,2678.62)
PB3: J4.32 U2.55 | length 4008.7
  Top Layer w7: U2.55@1258.39,2890.77 1086.86,2890.77 749.13,2553.05 749.13,2385.12 709.89,2345.88 709.89,1817.05 1337.84,1189.1 1995.82,1189.1 2229.92,1423.2 2539.27,1423.2 2562.62,1399.86 2764.17,1399.86 2793.26,1428.95 2793.26,1499.45 2742.16,1550.54 J4.32@2739.76,1550.54
PB4: J4.33 J8.6 U2.56 | length 3632
  Top Layer w7: U2.56@1258.39,2871.09 1085.56,2871.09 762.13,2547.66 762.13,2379.74 723.27,2340.88 723.27,1826.01 1310.47,1238.81 1983.68,1238.81 2215.4,1470.54 J8.6@2439.76,1470.54 2449.35,1460.95 2609.16,1460.95 2609.43,1460.68 2629.62,1460.68 J4.33@2639.76,1450.54
PB5: J4.30 U2.57 | length 3813.6
  Top Layer w7: U2.57@1258.39,2851.4 1084.26,2851.4 775.13,2542.28 775.13,2374.35 736.27,2335.49 736.27,1835.74 1320.2,1251.81 1946.58,1251.81 2218.2,1523.44 2480.18,1523.44 2504.85,1498.76 2671.08,1498.76 2692.05,1519.74 2692.05,1602.83 J4.30@2739.76,1650.54
PB6: J1.A7 J1.B7 J4.31 J8.5 P5.2 U2.58 | length 5671.1
  Top Layer w7: U2.58@1258.39,2831.72 1239.38,2831.72 1236.03,2828.37 1084.06,2828.37 800.73,2545.04 800.73,2354.6 755.83,2309.7 755.83,1919.54 1356.11,1319.25 1829.22,1319.25 1837.52,1310.96 v2(1840.67,1307.8) 1923.59,1307.8 2186.33,1570.54 J8.5@2439.76,1570.54 2454.1,1570.54 2464.79,1559.85 2630.45,1559.85 J4.31@2639.76,1550.54 ; P5.2@2190.46,513.94 2223.33,481.07 2223.33,395.3 2288.89,329.74 2314.23,304.4 2530.61,304.4 2653.21,427.01 2911.82,427.01 2939.03,399.8 2939.03,344.5 2938.09,343.56 2938.09,308.04 J1.B7@2935.68,305.64 2935.68,258.68 2940.16,254.2 2970.95,254.2 2975.05,258.3 J1.A7@2975.05,305.64
  Bottom Layer w7: v2(1840.67,1307.8) 1843.3,1307.8 1855.27,1319.78 1896.66,1319.78 1927.78,1288.66 1936.68,1279.76 2078.25,1138.19 2223.33,993.1 2223.33,546.81 P5.2@2190.46,513.94
PB7: J1.A6 J1.B6 J4.29 J8.4 P5.3 U2.59 | length 5657.7
  Top Layer w7: U2.59@1258.39,2812.03 1239.38,2812.03 1236.03,2815.37 1089.45,2815.37 813.73,2539.65 813.73,2349.22 768.83,2304.32 768.83,1924.92 1360.45,1333.3 1829.22,1333.3 v2(1840.67,1344.75) 1926.7,1344.75 2180.7,1598.75 2367.97,1598.75 J8.4@2439.76,1670.54 2444.89,1665.41 2610.55,1665.41 2625.42,1650.54 J4.29@2639.76,1650.54 ; P5.3@2269.2,513.94 2236.33,481.07 2236.33,400.68 2293.63,343.38 2319.61,317.4 2525.22,317.4 2647.82,440.01 2917.2,440.01 2952.03,405.18 2952.03,371.94 ; J1.A6@2955.37,305.64 2952.96,308.04 2952.96,343.56 2952.03,344.5 2952.03,354.14 ; J1.B6@2994.74,305.64 2994.74,353.04 2983.99,363.79 2961.67,363.79 ; 2952.03,354.14 2952.03,363.79 ; 2952.03,354.14 2961.67,363.79 ; 2952.03,363.79 2960.19,363.79 ; 2952.03,363.79 2952.03,371.94 ; 2952.03,371.94 2960.19,363.79 ; 2960.19,363.79 2961.67,363.79
  Bottom Layer w7: v2(1840.67,1344.75) 1843.3,1344.75 1855.27,1332.78 1902.04,1332.78 2091.25,1143.57 2236.33,998.49 2236.33,546.81 P5.3@2269.2,513.94
PB8: J4.27 J8.3 U2.61 | length 3044.3
  Top Layer w7: U2.61@1258.39,2772.66 1132.67,2772.66 871.49,2511.48 871.49,2346.76 821.33,2296.59 821.33,1969.41 1113.47,1677.27 2346.5,1677.27 J8.3@2439.76,1770.54 2454.1,1770.54 2467.4,1757.24 2633.06,1757.24 J4.27@2639.76,1750.54
PB9: J4.25 J8.2 U2.62 | length 3023.4
  Top Layer w7: U2.62@1258.39,2752.98 1131.37,2752.98 884.49,2506.1 884.49,2341.37 834.33,2291.21 834.33,1984.75 1122.49,1696.6 2265.82,1696.6 J8.2@2439.76,1870.54 2449.76,1860.54 2629.76,1860.54 J4.25@2639.76,1850.54
PB10: J4.1 J7.1 U2.29 | length 1264.5
  Top Layer w7: U2.29@1721.15,2949.83 1865.05,2949.83 2039.72,2775.15 2296.87,2775.15 2369.74,2848.01 2406.74,2885.01 2475.74,2885.01 2490.74,2900.01 2490.74,2979.56 J7.1@2439.76,3030.54
  Bottom Layer w7: J7.1@2439.76,3030.54 2448.84,3039.62 2613.26,3039.62 2639.76,3066.12 J4.1@2639.76,3070.54
PB11: J4.3 J7.2 U2.30 | length 1061
  Top Layer w7: U2.30@1721.15,2969.51 1864.96,2969.51 2046.32,2788.15 2291.49,2788.15 2433.88,2930.54 J7.2@2439.76,2930.54
  Bottom Layer w7: J7.2@2439.76,2930.54 2446.94,2937.72 2612.6,2937.72 2625.42,2950.54 J4.3@2639.76,2950.54
PB12: J4.15 J7.8 U2.33 | length 1724.8
  Top Layer w7: U2.33@1637.41,3092.62 1638.33,3093.54 1638.33,3121.51 1646.2,3129.38 1869.26,3129.38 1911.73,3086.91 1911.73,2956.77 2007.25,2861.25 2022.43,2861.25 v1(2025.68,2858) ; v1(2084.46,2333.27) 2431.04,2333.27 2436.78,2327.55 J7.8@2439.76,2330.54 2619.76,2330.54 J4.15@2639.76,2350.54
  Bottom Layer w7: v1(2025.68,2858) 2025.68,2392.05 v1(2084.46,2333.27)
PB13: J4.9 J7.5 U2.34 | length 1476.2
  Top Layer w7: U2.34@1617.72,3092.62 1617.72,3130.42 1632.37,3145.07 1871.96,3145.07 1928.77,3088.25 1928.77,2962.83 2003.43,2888.18 2092.58,2888.18 v1(2120.74,2860.01) ; v1(2137.94,2648.26) 2155.66,2630.54 J7.5@2439.76,2630.54 2527.74,2630.54 2547.74,2650.54 J4.9@2639.76,2650.54
  Bottom Layer w7: v1(2120.74,2860.01) 2139.75,2841 2139.75,2650.07 v1(2137.94,2648.26)
PB14: J4.11 J7.6 U2.35 | length 1629.3
  Top Layer w7: U2.35@1598.04,3092.62 1598.04,3136.87 1621.44,3160.27 1875.14,3160.27 1951.52,3083.88 1951.52,2958.47 2008.82,2901.18 2117.34,2901.18 2170.48,2848.05 v1(2170.48,2815.74) ; v1(2170.48,2528.97) 2431.45,2528.97 2434.82,2525.6 J7.6@2439.76,2530.54 2529.85,2530.54 2548.72,2549.41 2638.63,2549.41 J4.11@2639.76,2550.54
  Bottom Layer w7: v1(2170.48,2528.97) v1(2170.48,2815.74)
PB15: J4.13 J7.7 U2.36 | length 1783.9
  Top Layer w7: U2.36@1578.35,3092.62 1578.35,3141.58 1621.37,3184.6 1882.88,3184.6 1968.08,3099.4 1968.08,2960.29 2014.2,2914.18 2128.33,2914.18 2192.16,2850.34 v1(2196.76,2850.34) ; v1(2195.04,2426.81) 2436.03,2426.81 J7.7@2439.76,2430.54 2536.65,2430.54 2556.65,2450.54 J4.13@2639.76,2450.54
  Bottom Layer w7: v1(2195.04,2426.81) 2196.76,2428.54 v1(2196.76,2850.34)
PC0: J4.2 U2.9 | length 3151.6
  Top Layer w7: U2.9@1499.61,2629.87 1499.61,2522.74 1532.21,2490.14 1532.21,1921.28 1620.05,1833.44 2004.21,1833.44 2131.12,1960.34 2131.12,2122.08 2189.72,2180.68 v2(2546.81,2180.68)
  Bottom Layer w7: v2(2546.81,2180.68) 2569.03,2202.9 2569.03,2339.83 2541.86,2367.01 2541.86,2773.38 2568.13,2799.65 2776.14,2799.65 2792.01,2815.53 2792.01,3002.64 2744.11,3050.54 J4.2@2739.76,3050.54
PC1: J4.4 U2.10 | length 2885.1
  Top Layer w7: U2.10@1519.3,2629.87 1519.3,2523.02 1545.21,2497.12 1545.21,1938.49 1631.37,1852.33 1996.81,1852.33 2111.9,1967.42 2111.9,2245.8 2150.68,2284.59 2522.77,2284.59 v2(2523.69,2285.51)
  Bottom Layer w7: v2(2523.69,2285.51) 2523.69,2857 2568.48,2901.78 2691,2901.78 J4.4@2739.76,2950.54
PC2: J4.6 U2.11 | length 5463.8
  Top Layer w7: v1(1152.06,1254.48) 1291.69,1114.84 2824.65,1114.84 2951.51,1241.7 2951.51,1957.74 2878.13,2031.12 2878.13,2784.56 2792.14,2870.54 J4.6@2739.76,2870.54 ; U2.11@1538.98,2629.87 1538.91,2629.79 1538.91,2528.21 1558.21,2508.91 1558.21,2062.51 1658.58,1962.14 1746.78,1962.14 v2(1803.47,1905.45)
  Bottom Layer w7: v1(1152.06,1254.48) 1152.5,1254.48 v2(1803.47,1905.45)
PC3: J4.8 U2.12 | length 2285.4
  Top Layer w7: U2.12@1558.67,2629.87 1558.67,2532.33 1571.21,2519.79 1571.21,2115.61 1676.91,2009.9 1848.06,2009.9 2055.07,2216.91 2055.07,2354.88 2084.98,2384.79 2543.7,2384.79 2572.91,2414 v1(2574,2414)
  Bottom Layer w7: v1(2574,2414) 2574,2683.31 2592.87,2702.19 2671.41,2702.19 J4.8@2739.76,2770.54
PC4: J4.10 U2.24 | length 1443.6
  Top Layer w7: U2.24@1721.15,2851.4 1871.55,2851.4 2059.44,2663.51 2059.44,2566.73 2143.16,2483.01 2542.39,2483.01 2556.9,2497.52 2763.02,2497.52 2791.74,2526.24 2791.74,2598.56 J4.10@2739.76,2650.54
PC5: J4.12 U2.25 | length 1190.2
  Top Layer w7: U2.25@1721.15,2871.09 1870.25,2871.09 2076.22,2665.12 2076.22,2606.54 2101.45,2581.3 2540.03,2581.3 2557.32,2598.6 2691.7,2598.6 2722.45,2567.85 J4.12@2737.07,2567.85
PC6: J4.14 R14.1 U2.37 | length 2394.2
  Top Layer w7: U2.37@1558.67,3092.62 1558.67,3151.79 1614.27,3207.39 1904.61,3207.39 1959.02,3152.98 2028.49,3152.98 2040.69,3140.78 v1(2041.09,3140.78) 2060.81,3121.06 2060.81,3068.73 2038.72,3046.64 R14.1@2037.74,3046.64
  Bottom Layer w7: v1(2041.09,3140.78) 2041.09,3198.78 2167.68,3325.37 2632.5,3325.37 2820.59,3137.28 2820.59,2528.81 2742.32,2450.54 J4.14@2739.76,2450.54
PC7: J4.16 R13.1 U2.38 | length 2618.4
  Top Layer w7: U2.38@1538.98,3092.62 1538.98,3150.49 1610.31,3221.81 1912.53,3221.81 1957.51,3176.83 v1(1999.14,3176.83) 2044.45,3176.83 2074.87,3146.41 2074.87,3070.86 2099.09,3046.64 R13.1@2100.07,3046.64
  Bottom Layer w7: v1(1999.14,3176.83) 2000.75,3176.83 2171.32,3347.4 2668.17,3347.4 2843.29,3172.28 2843.29,2452.09 2741.74,2350.54 J4.16@2739.76,2350.54
PC8: J4.18 R12.1 U2.39 | length 2942
  Top Layer w7: U2.39@1519.3,3092.62 1519.3,3157.93 1612.77,3251.4 1922.96,3251.4 1969,3205.36 2102.92,3205.36 2196.81,3111.48 2196.81,3067.04 2192.2,3062.44 2192.2,3061.45 2177.39,3046.64 R12.1@2176.41,3046.64
  Bottom Layer w7: v1(1968.99,3205.37) 1993.43,3205.37 2149.28,3361.22 2698.98,3361.22 2868.4,3191.81 2868.4,2379.18 J4.18@2739.76,2250.54
PC9: J4.20 R11.1 U2.40 | length 3111.5
  Top Layer w7: U2.40@1499.61,3092.62 1499.61,3156.63 1607.39,3264.4 1956.74,3264.4 v1(1985.82,3235.32) 2002.77,3218.36 2108.3,3218.36 2218.34,3108.32 2218.34,3067.04 2222.95,3062.44 2222.95,3061.45 2237.76,3046.64 R11.1@2238.74,3046.64
  Bottom Layer w7: v1(1985.82,3235.32) 2127.7,3377.2 2714.68,3377.2 2889.2,3202.67 2889.2,2299.51 2740.23,2150.54 J4.20@2739.76,2150.54
PC10: J4.22 U2.51 | length 4858.3
  Top Layer w7: U2.51@1258.39,2969.51 1092.06,2969.51 665.4,2542.86 665.4,1797.66 1312.96,1150.1 2755.96,1150.1 2849.5,1243.64 2849.5,1940.8 J4.22@2739.76,2050.54
PC11: J4.24 U2.52 | length 4682.7
  Top Layer w7: U2.52@1258.39,2949.83 1090.76,2949.83 679.79,2538.86 679.79,1804.64 1321.32,1163.1 2750.58,1163.1 2836.5,1249.03 2836.5,1853.8 J4.24@2739.76,1950.54
PC12: J4.26 U2.53 | length 4498.1
  Top Layer w7: U2.53@1258.39,2930.14 1089.46,2930.14 694.44,2535.13 694.44,1811.34 1329.68,1176.1 2745.19,1176.1 2813.01,1243.92 2813.01,1777.29 J4.26@2739.76,1850.54
PC13: J4.28 U2.2 | length 3077.8
  Top Layer w7: U2.2@1361.82,2629.87 1361.82,2542.79 1302.51,2483.47 1021.77,2483.47 951.88,2413.58 951.88,2296.5 884.92,2229.54 884.92,2037.72 1147.56,1775.07 2086.29,1775.07 2231.67,1920.46 2556.3,1920.46 2578.19,1898.57 2676.03,1898.57 2690.74,1883.86 2690.74,1819.56 J4.28@2739.76,1770.54
PC14: J3.17 R5.1 | length 988.3
  Top Layer w8: v2(976.78,2205.01) 1057.62,2205.01 R5.1@1064.62,2212.01
  Bottom Layer w8: J3.17@239.76,2170.54 249.46,2180.24 249.46,2204.24 287.04,2241.82 287.04,2304.05 303.62,2320.63 832.16,2320.63 946.7,2206.1 975.7,2206.1 v2(976.78,2205.01)
PC15: J3.19 R6.1 | length 1110.8
  Top Layer w8: v1(928.52,2170.54) 1161.29,2170.54 1187.88,2197.12 1187.88,2197.71 1202.18,2212.01 R6.1@1203.17,2212.01
  Bottom Layer w8: J3.19@239.76,2070.54 287.47,2118.25 287.47,2193.3 318.29,2224.12 670.35,2224.12 670.48,2224.26 874.8,2224.26 v1(928.52,2170.54)
PD2: J3.21 U2.54 | length 1850.6
  Top Layer w7: v1(719.63,2416.05) 719.63,2541.93 1088.16,2910.46 U2.54@1258.39,2910.46
  Bottom Layer w7: J3.21@239.76,1970.54 178.38,1970.54 156.57,1992.36 156.57,2281.33 200.36,2325.12 267.51,2325.12 286.34,2343.95 286.34,2395.62 310.3,2419.58 707.03,2419.58 707.31,2419.3 716.38,2419.3 v1(719.63,2416.05)
V5V: C1.1 S1.2 U1.3 | length 1023.3
  Top Layer w30: U1.3@2576.94,948.05 2579.8,945.19 U1.3@2648.8,945.19 ; U1.3@2648.8,945.19 2679.15,914.83 v2(2679.15,899.02) 2682.96,902.82 2702.59,902.82 2717.59,917.82 C1.1@2717.59,922.82 2708.05,932.36 v2(2682.22,932.36) 2669.4,945.19 U1.3@2648.8,945.19
  Bottom Layer w30: S1.2@3200.79,723.93 S1.2@3198.87,725.85 3198.87,854.84 3121.35,932.36 2696.5,932.36 ; 2696.5,932.36 v2(2682.22,932.36) 2679.15,929.29 v2(2679.15,899.02) 2704.5,924.37 2696.5,932.36
VBAT: C6.1 J4.36 P4.4 U2.1 | length 4279.3
  Top Layer w10: C6.1@1296.96,2550.22 1296.96,2551.21 1310.27,2564.51 1311.26,2564.51 1342.13,2595.39 U2.1@1342.13,2629.87
  Top Layer w20: C6.1@1288.42,2547.46 1288.42,2515.27 1276.26,2503.1 990.02,2503.1 920.59,2433.67 920.59,2300.4 862.13,2241.93 862.13,2000.42 1123.85,1738.7 2149.5,1738.7 2242.58,1831.78 2282.63,1831.78 ; v2@2314.09,1817.47 2296.94,1817.47 2282.63,1831.78 ; v2@2319.13,1822.51 2311.39,1830.25 2301.31,1830.25 2299.78,1831.78 v2(2297.62,1831.78) 2282.63,1831.78 ; v2@2324.17,1817.47 2325.7,1815.94 v2(2327.87,1815.94)
  Bottom Layer w22: v2(2297.62,1831.78) 2297.62,1830.15 2313.46,1814.31 ; v2@2300.39,1830.63 2311.55,1830.63 2326.24,1815.94 v2(2327.87,1815.94) ; v2@2324.82,1802.95 2324.82,1218.3 2354.21,1188.91 2526.03,1188.91 2559.94,1222.82 2559.94,1289.79 2572.83,1302.68 2691.9,1302.68 J4.36@2739.76,1350.54 2967.41,1350.54 2994.89,1323.06 3120.91,1323.06 P4.4@3171.43,1272.54
VDD: C4.1 C9.2 C10.2 J3.1 J3.2 P3.8 P4.2 P6.7 P6.8 R20.1 S4.1 U2.19 U2.32 U2.64 | length 8485.9
  Top Layer w7: U2.32@1721.15,3008.88 1721.39,3009.12 1771.85,3009.12 1788.93,3026.21 C10.2@1788.93,3028.22 ; C10.2@1787.58,3026.87 C10.2@1803.74,3043.03 ; C10.2@1802.38,3041.67 1805.1,3041.67 1805.1,3042.37 1818.55,3055.82 C10.2@1819.24,3055.82
  Top Layer w10: C4.1@1175.75,2673.25 1175.75,2674.23 1215.13,2713.61 U2.64@1258.39,2713.61 ; U2.19@1721.15,2752.98 1786.26,2752.98 1799.11,2740.13 1803.74,2740.13 1801.12,2737.51 1801.12,2721.01 C9.2@1803.74,2718.39
  Top Layer w25: v2(1174.39,2642.66) 1174.97,2643.23 1174.97,2673.44 C4.1@1175.75,2674.23
  Top Layer w30: v2(1802.01,3075.12) 1802.01,3045.28 1804,3043.29 C10.2@1803.74,3043.03 ; v2@2656.04,3414.33 v2(2656.04,3412.37) ; P6.7@3071.43,2270.53 P6.8@3171.43,2270.53 3240.22,2270.53 3284.39,2314.7 3284.39,2485.53 S4.1@3284.39,2933.01 3284.65,2933.28 3284.65,2966.1 ; R20.1@3163.2,2724.84 3163.2,2688.81 ; v2@3164.07,2672.06 v2@3163.2,2672.93 ; 3284.39,2966.1 3284.39,2984.6 3223.05,3045.94 2934.66,3045.94 2656.04,3324.55 2656.04,3380.12 ; 2656.04,3380.12 v2(2622.17,3413.99) 2654.43,3413.99 v2(2656.04,3412.37) ; 2656.04,3380.12 v2(2656.04,3412.37) ; 3147.32,2672.93 v2@3163.2,2672.93 ; 3147.32,2672.93 3134.85,2672.93 v2(3132.48,2670.56) 3144.95,2670.56 3147.32,2672.93 ; 3147.32,2672.93 3163.2,2688.81 ; v2@3163.2,2672.93 3163.2,2688.81
  Bottom Layer w25: J3.1@239.76,2970.54 J3.2@339.76,2970.54 339.76,3177.96 412.21,3250.41 782.19,3250.41 800.22,3232.37 867.7,3164.9 867.7,2988.41 928.02,2928.09 1155.13,2928.09 1205.38,2877.83 1205.38,2672.84 1109.95,2577.4 1109.95,2259.64 1197.03,2172.55 1463.8,2172.55 1543.73,2252.49 1543.73,2364.4 1681,2501.68 1681,2623.98 v2@1801.44,2744.42
  Bottom Layer w30: v2@1801.44,2744.42 1801.44,3131.55 2082.26,3412.37 v2(2656.04,3412.37) ; v2(3132.48,2670.56) 3133.98,2672.06 3164.07,2672.06 3208.34,2672.06 3245.68,2634.71 3245.68,2344.79 P6.8@3171.43,2270.53 3179.54,2270.53 3233.68,2216.4 3233.68,1691.67 3212.55,1670.54 P3.8@3171.43,1670.54 ; P4.2@3171.43,1372.54 3205.23,1372.54 3233.68,1400.99 3233.68,1649.42 3223.11,1659.98
  other v2: 3167.07,2672.06 1801.12,2742.75
VDDA: C18.1 J4.5 J7.3 R20.2 U2.13 | length 8392.9
  Top Layer w7: U2.13@1578.35,2629.87 1578.35,2562.28 ; C18.1@1625.64,2416.97 1625.64,2509.03 1578.35,2556.32 1578.35,2562.28 ; C18.1@1634.12,2421.88 1631.13,2424.87 1631.13,2509.51 1578.35,2562.28
  Top Layer w20: 1352.67,830.93 975.14,1208.45 975.14,1208.91 912.29,1271.76 ; C18.1@1625.64,2416.97 1633.47,2409.13 1657.83,2409.13 1671.22,2395.73 1671.22,2136.9 1720.14,2087.99 1751.65,2087.99 ; v2@1781.74,2063.13 1781.74,2086.62 1783.11,2087.99 ; 1787.35,2071.86 v2@1787.35,2068.74 ; v2@2614.07,607.12 2617.12,610.17 v2@2629.41,610.17 ; v2@887.56,1296.49 912.29,1271.76 ; v2@887.56,1296.49 v2(886.03,1298.02) 886.03,1296.97 863.25,1274.19 v2(863.25,1273.14) 864.62,1271.76 888.46,1271.76 ; v2@887.56,1296.49 887.56,1272.66 888.46,1271.76 ; 888.46,1271.76 912.29,1271.76 ; 1751.65,2087.99 1780.21,2059.43 1780.21,2060.86 1787.35,2068.01 v2@1787.35,2068.74 ; 1751.65,2087.99 1783.11,2087.99 ; 1783.11,2087.99 1801.31,2087.99 1799.78,2086.46 1799.78,2081.17 v2@1787.35,2068.74
  Top Layer w22: 1352.67,830.93 2113.15,830.93 2273.3,670.77 2375.26,670.77 2452.49,593.55 2585.15,593.55 2598.72,607.12 v2(2600.35,607.12) 2614.07,607.12 v2@2629.41,607.12 ; J4.5@2639.76,2850.54 2643.56,2850.54 2693.04,2900.02 2800.18,2900.02 2963.31,2736.88 3038.96,2736.88 ; v2@3070.49,2717.51 R20.2@3095.27,2717.51 ; R20.2@3102.57,2724.84 R20.2@3095.27,2717.51 ; 3038.96,2736.88 v2(3068.9,2706.94) 3070.53,2706.94 3080.13,2716.55 3095.27,2716.55 R20.2@3095.27,2717.51 ; 3038.96,2736.88 v2(3067.48,2736.88) 3075.89,2736.88 3079.64,2733.13 3095.27,2733.13 R20.2@3095.27,2717.51
  Top Layer w30: J7.3@2439.76,2830.54 2522.65,2830.54 2542.65,2850.54 J4.5@2639.76,2850.54
  Bottom Layer w20: v2(863.25,1273.14) 863.25,1275.24 v2(886.03,1298.02) 1323.43,1735.42 1456.2,1735.42 v2@1780.21,2059.43 ; v2@1783.74,2065.25 v2@1801.78,2083.29 ; v2@1799.78,2081.17 v2@1781.74,2063.13 ; v2@1780.21,2059.43 1781.74,2060.96 v2@1781.74,2063.13 ; v2@1780.21,2059.43 1780.21,2061.6 v2@1781.74,2063.13
  Bottom Layer w22: v2(3068.9,2706.94) v2@3068.19,2707.65 ; 3101.19,2736.88 3100.47,2736.88 ; 2600.35,638.22 v2(2629.41,609.15) 2628.4,608.14 2601.36,608.14 v2(2600.35,607.12) 2600.35,638.22 ; 2600.35,638.22 2600.35,955.91 2667.77,1023.34 3223.19,1023.34 3294.75,1094.9 3294.75,2672.65 3230.52,2736.88 3100.47,2736.88 ; v2@3068.19,2707.65 3071.24,2707.65 3100.47,2736.88 ; v2@3068.19,2707.65 3068.19,2736.17 v2(3067.48,2736.88) 3100.47,2736.88
  other v2: 1782.21,2058.43 1805.31,2083.99